# Altium PCB PCB_CONTROL.PcbDoc (part 1 of 15)
Units mil, origin at the board's own origin, x right, y up, seen from the top; angles counter-clockwise.
Board outline 7360.03 x 4773.15 mil, 2 copper layers (Top Layer, Bottom Layer); 73 components, 135 nets, 396 pads, 106 vias.
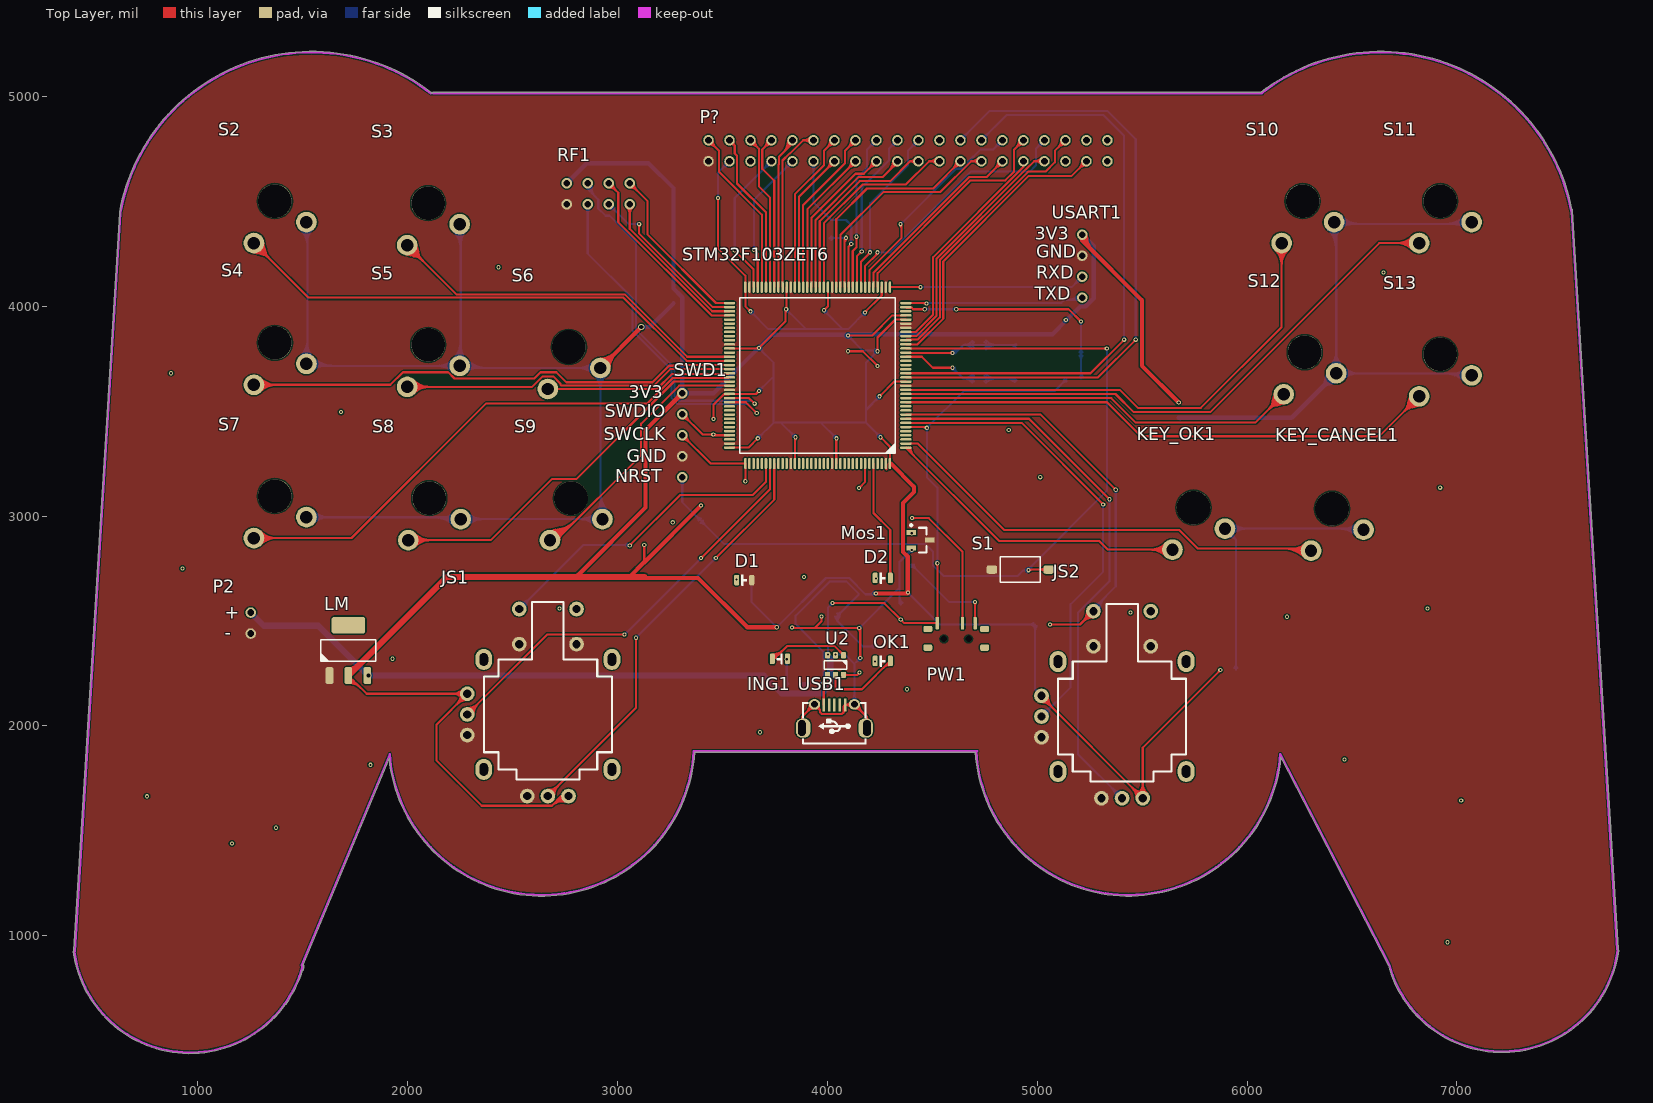
[diagram p0: Top Layer view]
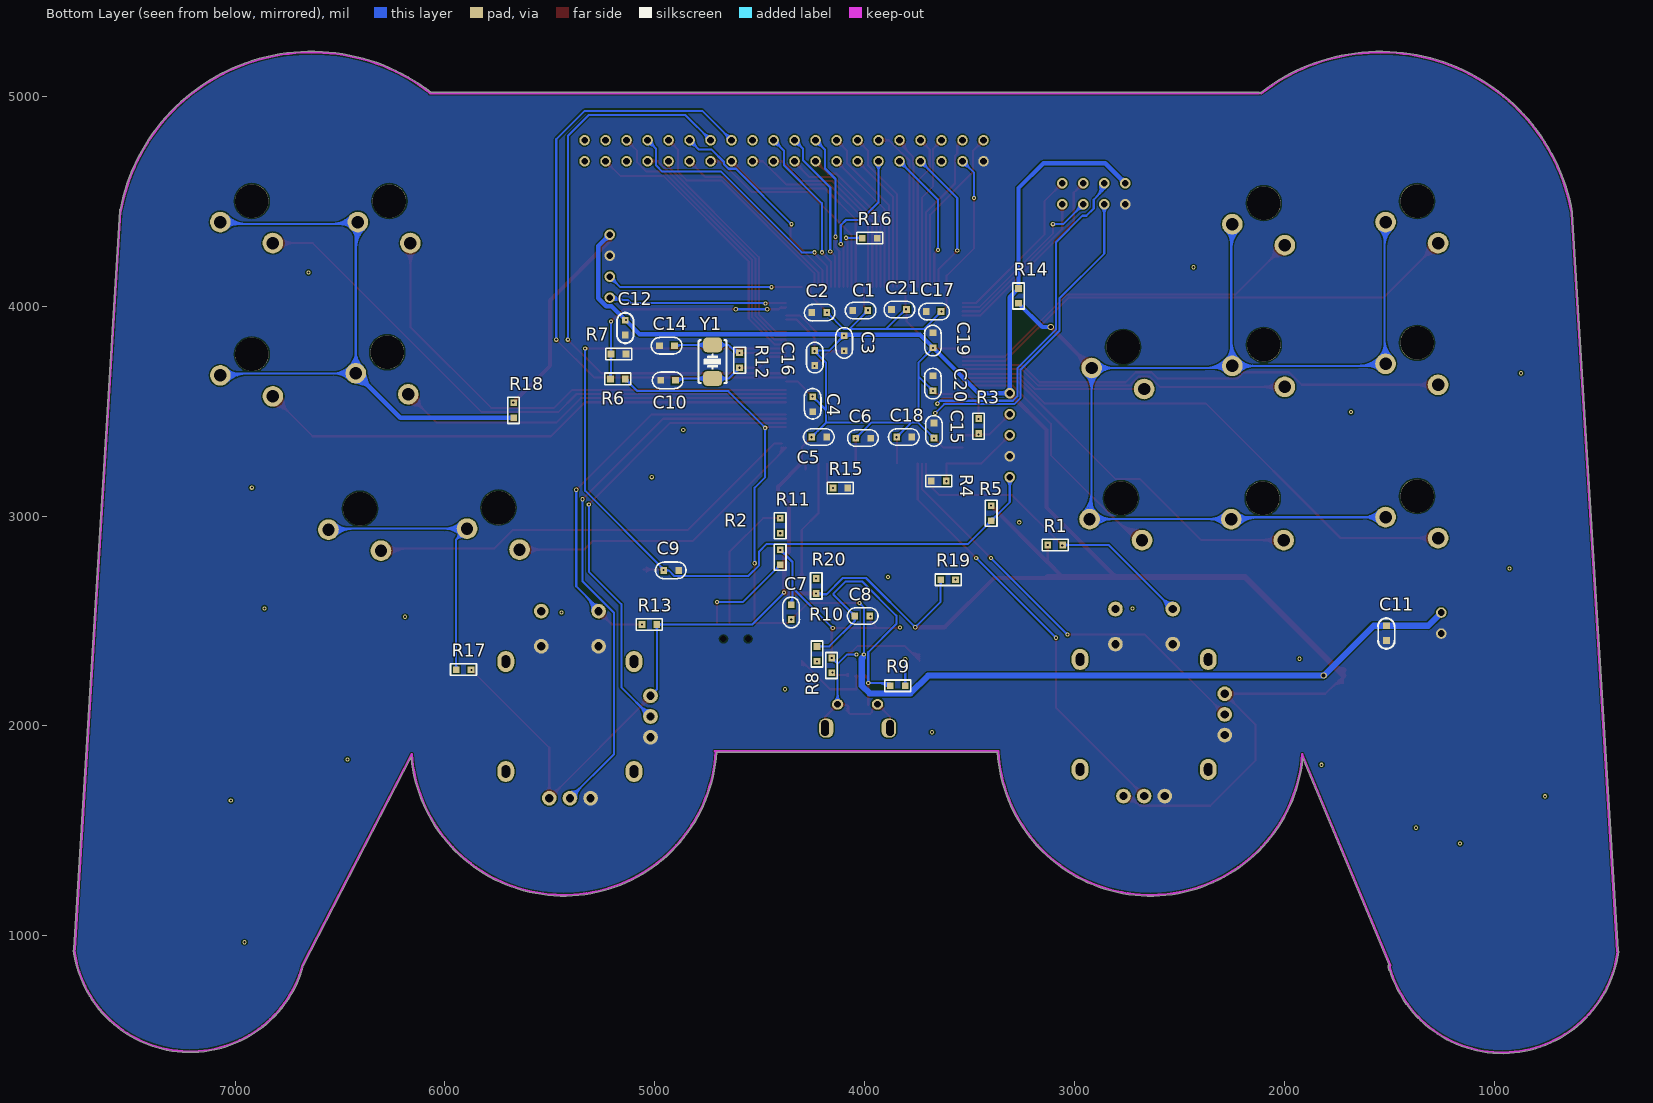
[diagram p1: Bottom Layer view, seen from below]
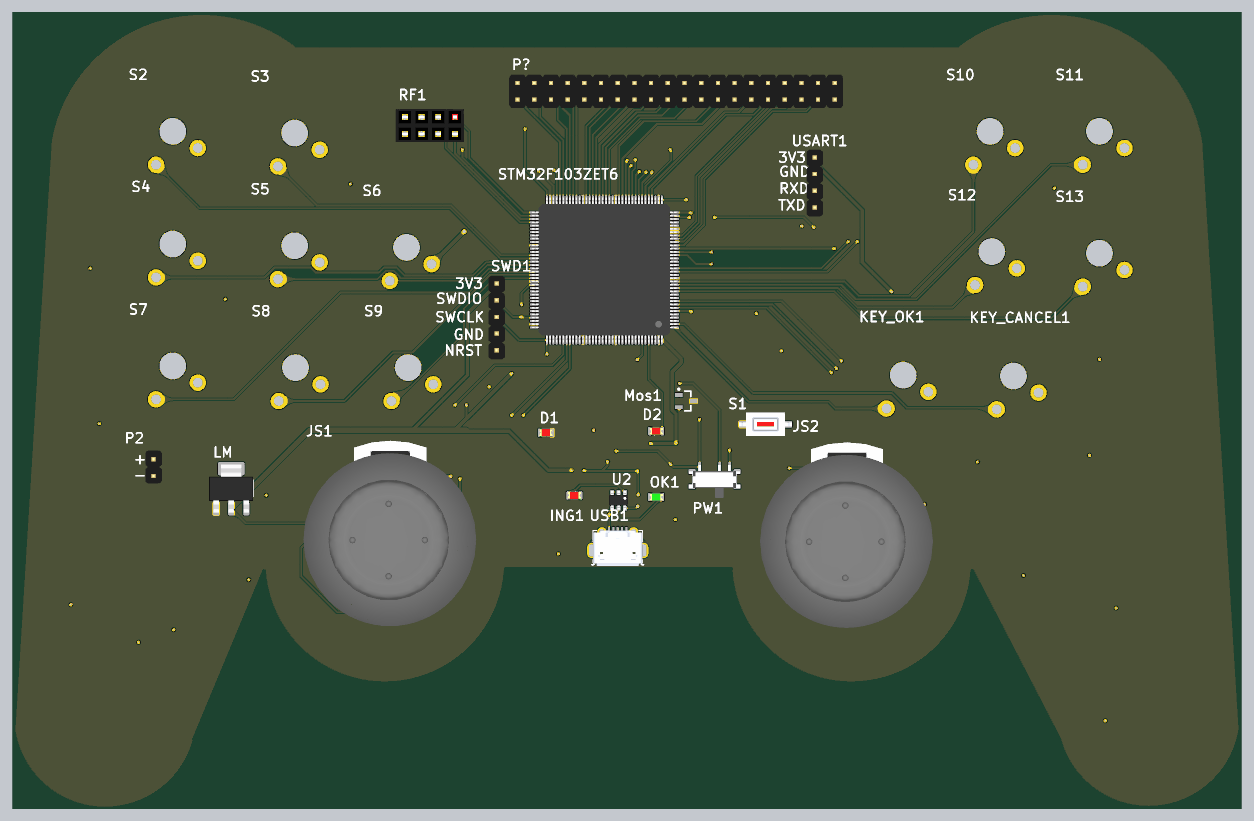
[diagram p16: 3D render of the assembled board from above, using the file's embedded part models]
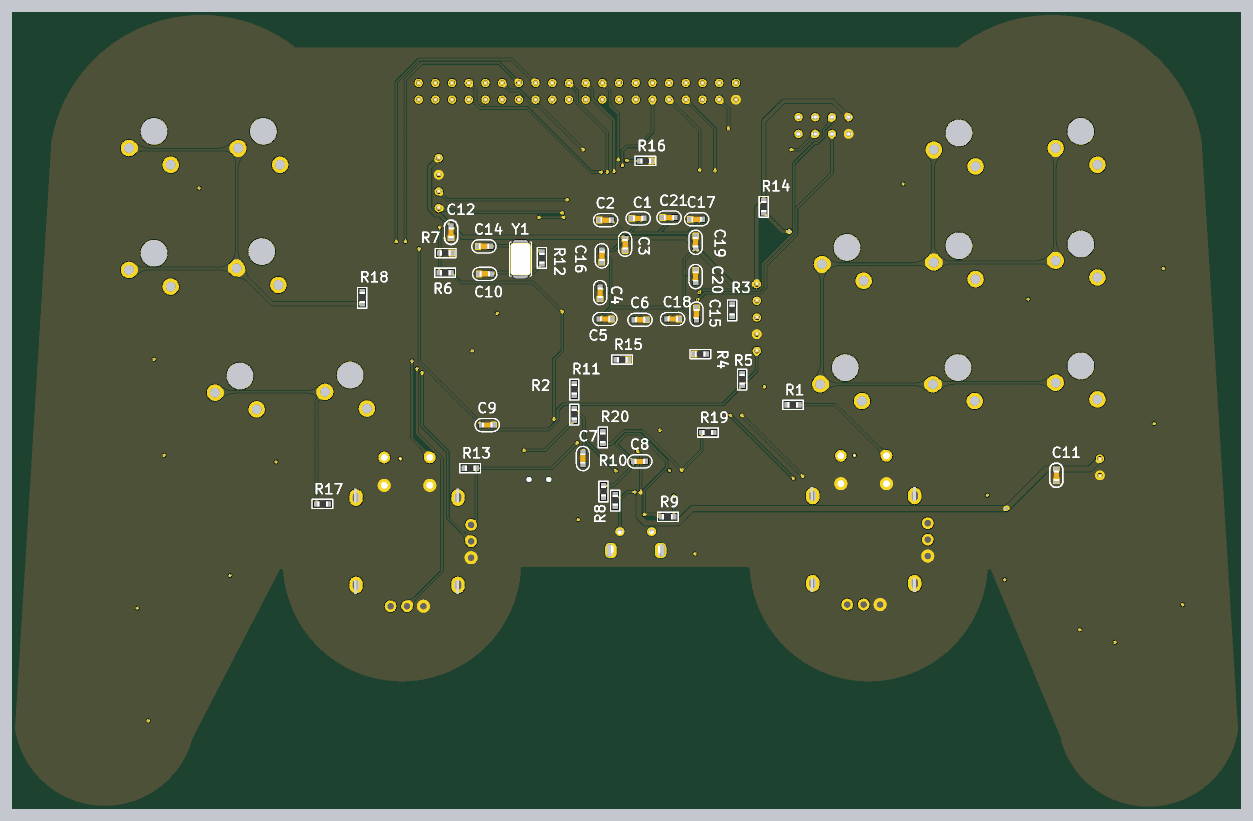
[diagram p17: 3D render of the assembled board from below, using the file's embedded part models]

## Layer stack, top to bottom
Top Layer: signal copper 1.4
Dielectric: dielectric 12.6, FR-4, Dk 4.8
Bottom Layer: signal copper 1.4

## Board outline
1500.25,834.99 ccw(c1500,840) 1504.96,839.23 ccw(c955,925) 1507.31,855.96 ccw(c1502.33,856.58) 1507.34,856.58 ccw(c1502.33,856.58) 1503.54,861.45 1913.66,1846.2 ccw(c2640,1920) 3368.7,1875.04 4706.3,1875.04 ccw(c5435,1920) 6161.73,1850.08 6673.98,860.03 ccw(c7215,1005) 7769.97,929.32 ccw(c7765,930) 7770.02,930 ccw(c7765,930) 7767.76,934.19 ccw(c7762.79,934.86) 7767.81,934.86 ccw(c7762.79,934.86) 7767.8,935.17 7550.01,4455.31 ccw(c7545,4455) 7547.46,4459.37 7547.45,4459.37 ccw(c6635.53,4284.64) 6065.24,5017.38 2122.64,5017.38 ccw(c2122.64,5012.36) 2117.84,5013.81 ccw(c2113.03,5012.36) 2116.12,5016.32 ccw(c1544.47,4284.64) 630.06,4445.87 ccw(c635,4445) 629.99,4445.29 629.99,4445.31 629.99,4445.29 412.46,929.32 ccw(c415,925) 410.03,924.32 ccw(c965,1000)

## Design rules (kind name [scope] priority, off if disabled: settings)
Clearance [All] p1: gap=6
Height [All] p1: minheight=0 maxheight=5000 prefheight=500
PolygonConnect [All] p1: connectstyle=Direct reliefconductorwidth=10 reliefentries=4 polygonreliefangle="90 Angle" airgapwidth=10
RoutingVias [All] p1: holewidth=28 width=50 viastyle="Through Hole" minholewidth=28 minwidth=50 maxholewidth=28 maxwidth=50
SolderMaskExpansion [All] p1: expansion=4
Width [All] p1: maxlimit=100 minlimit=10 preferedwidth=10
27 further rules are at their usual default settings.

## Components (designator, comment, footprint, x,y, rotation, side; value= is the part's Value field where it differs from the comment)
C1 "Cap" CAP_0603 4020,3980 r0 bottom
C2 "Cap" CAP_0603 4215,3970 r0 bottom
C3 "Cap" CAP_0603 4100,3825 r270 bottom
C4 "Cap" CAP_0603 4250,3535 r270 bottom
C5 "Cap" CAP_0603 4220,3375 r180 bottom
C6 "Cap" CAP_0603 4010,3370 r180 bottom
C7 "Cap_0603" CAP_0603 4350,2540 r90 bottom
C8 "Cap_0603" CAP_0603 4010,2525 r0 bottom
C9 "Cap" CAP_0603 4925,2740 r180 bottom
C10 "Cap" CAP_0603 4940,3645 r180 bottom
C11 "Cap_0603" CAP_0603 1515,2440 r90 bottom
C12 "Cap_0603" CAP_0603 5140,3895 r90 bottom
C14 "Cap" CAP_0603 4945,3810 r180 bottom
C15 "Cap" CAP_0603 3670,3405 r90 bottom
C16 "Cap" CAP_0603 4240,3755 r270 bottom
C17 "Cap" CAP_0603 3670,3975 r0 bottom
C18 "Cap" CAP_0603 3815,3375 r180 bottom
C19 "Cap" CAP_0603 3675,3835 r90 bottom
C20 "Cap" CAP_0603 3675,3630 r90 bottom
C21 "Cap" CAP_0603 3835,3985 r0 bottom
D1 "LED_0805" LED_0805_RED 3605,2695 r0 top
D2 "LED_0805" LED_0805_RED 4265,2705 r0 top
ING1 "LED_0805" LED_0805_RED 3775,2320 r180 top
JS1 "JoyStick" JoyStick 2670,2055 r270 top
JS2 "JoyStick" JoyStick 5405,2045 r270 top
KEY_CANCEL1 "MX_SW" MX_SW-1 6405,3035 r0 top
KEY_OK1 "MX_SW" MX_SW-1 5745,3040 r0 top
LM "LM1117" SOT223-3 1720,2360 r0 top
Mos1 "MOSFET N" Nmos_SOT23 4445,2885 r0 top
OK1 "LED_0805" LED_0805_GREEN 4265,2310 r0 top
P2 "HDR1x2_1.27" HDR1X2_2.54_180 1255,2440 r180 top
P? "HDR2x20_2.54" HDR2X20_2.54_180 3435,4690 r90 top
PW1 "SwitchSPDT_2.8x6.6_90" SwitchSPDT_2.8X6.6_90 4615,2415 r0 top
R1 "Res_0603" RES_0603 3095,2780 r0 bottom
R2 "Res_0603" RES_0603 4485,2805 r90 bottom
R3 "Res1" RES_0603 3540,3430 r90 bottom
R4 "Res1" RES_0603 3650,3085 r0 bottom
R5 "Res1" RES_0603 3480,3015 r90 bottom
R6 "Res_0603" RES_0603 5175,3735 r180 bottom
R7 "Res_0603" RES_0603 5175,3690 r0 bottom
R8 "Res_0603" RES_0603 4240,2290 r90 bottom
R9 "Res_0603" RES_0603 3845,2110 r0 bottom
R10 "Res_0603" RES_0603 4310,2345 r90 bottom
R11 "Res_0603" RES_0603 4485,2955 r90 bottom
R12 "Res1" RES_0603 4515,3740 r270 bottom
R13 "Res_0603" RES_0603 5025,2565 r180 bottom
R14 "Res_0603" RES_0603 3350,4050 r90 bottom
R15 "Res1" RES_0603 4115,3215 r180 bottom
R16 "Res1" RES_0603 3975,4405 r180 bottom
R17 "Res_0603" RES_0603 5910,2350 r180 bottom
R18 "Res_0603" RES_0603 5755,3505 r90 bottom
R19 "Res1" RES_0603 3605,2615 r0 bottom
R20 "Res1" RES_0603 4150,2665 r270 bottom
RF1 "NRF2401_优信" HDR2X4_2.54_180F 2760,4485 r90 top
S1 "SW-PB" ButtonTACT_3x6x2.5_180 4920,2745 r180 top
S2 "MX_SW" MX_SW-1 1370,4500 r0 top
S3 "MX_SW" MX_SW-1 2100,4490 r0 top
S4 "MX_SW" MX_SW-1 1370,3825 r0 top
S5 "MX_SW" MX_SW-1 2100,3815 r0 top
S6 "MX_SW" MX_SW-1 2770,3805 r0 top
S7 "MX_SW" MX_SW-1 1370,3095 r0 top
S8 "MX_SW" MX_SW-1 2105,3085 r0 top
S9 "MX_SW" MX_SW-1 2780,3085 r0 top
S10 "MX_SW" MX_SW-1 6265,4500 r0 top
S11 "MX_SW" MX_SW-1 6920,4500 r0 top
S12 "MX_SW" MX_SW-1 6275,3780 r0 top
S13 "MX_SW" MX_SW-1 6920,3770 r0 top
STM32F103ZET6 "STM32F103ZET6" LQFP_P0.5_144 3955,3670 r180 top (schematic designator U1)
SWD1 "Header 5" HDR1X5_2.54_180 3310,3585 r0 top
U2 "TP4059" SOT23-6 4040,2290 r270 top
USART1 "Header 4" HDR1x4_2.54_180 5215,4340 r0 top
USB1 "USB_Micro" USB_Micro-AB 4035,2000 r180 top
Y1 "8M" XT_5032_2 4725,3735 r270 bottom

## Footprints (in the part's own frame and the unit in brackets; to place one, negate y for a bottom-side part, rotate by r counter-clockwise, add the part's x,y. Pads: shape width x height; smd on the part's side, far side on the other; paste and mask are expansions set on the pad)
ButtonTACT_3x6x2.5_180 [mil]
  rrect50% 50x40 smd: 1(-135,0) 2(135,0)
  silkscreen extent -95,-60 95,60, body extent -157,-71 157,71, height 94
CAP_0603 [mil]
  rect 32x32 smd: 1(-33,1) 2(38,1)
  silkscreen extent -72,-38 73,41, body extent -30,-14 33,18, height 31
HDR1X2_2.54_180 [mil]
  round 50 hole 32: 1(0,0) 2(0,-100)
  body extent -49,-150 49,50, height 323
HDR1x4_2.54_180 [mil]
  round 50 hole 32: 1(0,0) 2(0,-100) 3(0,-200) 4(0,-300)
  body extent -49,-350 49,50, height 323
HDR1X5_2.54_180 [mil]
  round 50 hole 32: 1(0,0) 2(0,-100) 3(0,-200) 4(0,-300) 5(0,-400)
  body extent -49,-450 49,50, height 323
HDR2X4_2.54_180F [mil]
  round 50 hole 32: 1(0,0) 2(100,0) 3(0,-100) 4(100,-100) 5(0,-200) 6(100,-200) 7(0,-300) 8(100,-300)
  body extent -48,-355 148,55, height 335
HDR2X20_2.54_180 [mil]
  round 50 hole 32: 1(0,0) 2(100,0) 3(0,-100) 4(100,-100) 5(0,-200) 6(100,-200) 7(0,-300) 8(100,-300) 9(0,-400) 10(100,-400) 11(0,-500) 12(100,-500) 13(0,-600) 14(100,-600) 15(0,-700) 16(100,-700) 17(0,-800) 18(100,-800) 19(0,-900) 20(100,-900) 21(0,-1000) 22(100,-1000) 23(0,-1100) 24(100,-1100) 25(0,-1200) 26(100,-1200) 27(0,-1300) 28(100,-1300) 29(0,-1400) 30(100,-1400) 31(0,-1500) 32(100,-1500) 33(0,-1600) 34(100,-1600) 35(0,-1700) 36(100,-1700) 37(0,-1800) 38(100,-1800) 39(0,-1900) 40(100,-1900)
  body extent -50,-1950 150,50, height 335
JoyStick [mil]
  oval 100x80 hole 40 slot 60 at 0 deg: 0(-261.81,305.12) 0(-261.81,-305.12) 0(261.81,305.12) 0(261.81,-305.12)
  round 70 hole 39.37: 1(-98.43,-383.86) 2(0,-383.86) 3(98.43,-383.86) 4(388.86,-98.43) 5(388.86,0) 6(388.86,98.43) 7(-501.97,136.57) 8(-334.8,136.57) 9(-501.97,-136.57) 10(-334.8,-136.57)
  silkscreen extent -535,-305 310,305, body extent -592,-518 518,518, height 1126
LED_0805_GREEN [mil]
  rrect50% 24x50 smd: 1(-36,0) 2(36,0)
  silkscreen extent -12,-24 12,24, body extent -40,-25 40,25, height 43
LED_0805_RED [mil]
  rrect50% 24x50 smd: 1(-36,0) 2(36,0)
  silkscreen extent -12,-24 12,24, body extent -40,-25 40,25, height 43
LQFP_P0.5_144 [mil]
  oval 54x12 smd: 1(-420,344.49) 2(-420,324.8) 3(-420,305.12) 4(-420,285.43) 5(-420,265.75) 6(-420,246.06) 7(-420,226.38) 8(-420,206.69) 9(-420,187.01) 10(-420,167.32) 11(-420,147.64) 12(-420,127.95) 13(-420,108.27) 14(-420,88.58) 15(-420,68.9) 16(-420,49.21) 17(-420,29.53) 18(-420,9.84) 19(-420,-9.84) 20(-420,-29.53) 21(-420,-49.21) 22(-420,-68.9) 23(-420,-88.58) 24(-420,-108.27) 25(-420,-127.95) 26(-420,-147.64) 27(-420,-167.32) 28(-420,-187.01) 29(-420,-206.69) 30(-420,-226.38) 31(-420,-246.06) 32(-420,-265.75) 33(-420,-285.43) 34(-420,-305.12) 35(-420,-324.8) 36(-420,-344.49) 73(420,-344.49) 74(420,-324.8) 75(420,-305.12) 76(420,-285.43) 77(420,-265.75) 78(420,-246.06) 79(420,-226.38) 80(420,-206.69) 81(420,-187.01) 82(420,-167.32) 83(420,-147.64) 84(420,-127.95) 85(420,-108.27) 86(420,-88.58) 87(420,-68.9) 88(420,-49.21) 89(420,-29.53) 90(420,-9.84) 91(420,9.84) 92(420,29.53) 93(420,49.21) 94(420,68.9) 95(420,88.58) 96(420,108.27) 97(420,127.95) 98(420,147.64) 99(420,167.32) 100(420,187.01) 101(420,206.69) 102(420,226.38) 103(420,246.06) 104(420,265.75) 105(420,285.43) 106(420,305.12) 107(420,324.8) 108(420,344.49)
  oval 12x54 smd: 37(-344.49,-420) 38(-324.8,-420) 39(-305.12,-420) 40(-285.43,-420) 41(-265.75,-420) 42(-246.06,-420) 43(-226.38,-420) 44(-206.69,-420) 45(-187.01,-420) 46(-167.32,-420) 47(-147.64,-420) 48(-127.95,-420) 49(-108.27,-420) 50(-88.58,-420) 51(-68.9,-420) 52(-49.21,-420) 53(-29.53,-420) 54(-9.84,-420) 55(9.84,-420) 56(29.53,-420) 57(49.21,-420) 58(68.9,-420) 59(88.58,-420) 60(108.27,-420) 61(127.95,-420) 62(147.64,-420) 63(167.32,-420) 64(187.01,-420) 65(206.69,-420) 66(226.38,-420) 67(246.06,-420) 68(265.75,-420) 69(285.43,-420) 70(305.12,-420) 71(324.8,-420) 72(344.49,-420) 109(344.49,420) 110(324.8,420) 111(305.12,420) 112(285.43,420) 113(265.75,420) 114(246.06,420) 115(226.38,420) 116(206.69,420) 117(187.01,420) 118(167.32,420) 119(147.64,420) 120(127.95,420) 121(108.27,420) 122(88.58,420) 123(68.9,420) 124(49.21,420) 125(29.53,420) 126(9.84,420) 127(-9.84,420) 128(-29.53,420) 129(-49.21,420) 130(-68.9,420) 131(-88.58,420) 132(-108.27,420) 133(-127.95,420) 134(-147.64,420) 135(-167.32,420) 136(-187.01,420) 137(-206.69,420) 138(-226.38,420) 139(-246.06,420) 140(-265.75,420) 141(-285.43,420) 142(-305.12,420) 143(-324.8,420) 144(-344.49,420)
  silkscreen extent -370,-370 370,370, body extent -433,-433 433,433, height 63
MX_SW-1 [mm] "without Fixation pins  1-Pole"
  round 2.5 hole 1.5: 1(3.81,-2.54) 2(-2.54,-5.08)
  round 4.064 hole 4.064: ""(0,0)
Nmos_SOT23 [mm]
  rect 1.15x0.6 smd: D(1.125,0) G(-1.125,0.95) S(-1.125,-0.95)
  silkscreen extent -1.25,-1.5 0.7,1.92, body extent -0.7,-1.5 0.7,1.5, height 1.14
RES_0603 [mil]
  rect 32x32 smd: 1(-37,-82) 2(34,-82)
  silkscreen extent -64,-109 60,-54, body extent -31,-98 31,-66, height 18
SOT23-6 [mil]
  rrect50% 30x24 smd: 1(-47,38) 2(-47,0) 3(-47,-38) 4(47,-38) 5(47,0) 6(47,38)
  silkscreen extent -21,-53 21,53, body extent -55,-57 55,57, height 57
SOT223-3 [mil]
  rrect40% 36x80 smd: 1(-90.16,-120) 2(0,-120) 3(90.16,-120)
  rrect30% 160x80 smd: 4(0,120)
  silkscreen extent -131,-51 131,51, body extent -132,-144 132,144, height 71
SwitchSPDT_2.8X6.6_90 [mil]
  rrect50% 42x30 smd: 0(-135,-42) 0(-135,47) 0(135,-42) 0(135,47)
  round 10 hole 31.5: 0(-59.06,0) 0(59.06,0)
  rrect50% 16x60 smd: 1(90,75) 2(30,75) 3(-90,75)
  body extent -152,-111 151,86, height 55
USB_Micro-AB [mil]
  rrect80% 68x90 hole 37 slot 75 at 90 deg copper offset 6,0 mask+0: 0(-155,10)
  oval 54x50 hole 32 mask+0: 0(-95,-103) 0(95,-103)
  rrect80% 68x90 hole 37 slot 75 at 90 deg copper offset -6,0 mask+0: 0(155,10)
  rrect50% 12x64 smd: 1(51.18,-100) 2(25.59,-100) 3(0,-100) 4(-25.59,-100) 5(-51.18,-100)
  silkscreen extent -150,-113 150,86, body extent -161,-109 161,104, height 108
XT_5032_2 [mil]
  rrect50% 70x90 smd: 1(-80,0) 2(80,0)
  silkscreen extent -105,-69 105,69, body extent -98,-63 98,63, height 39

## Part data
C1 C2 C3 C4 C5 C6 C10 C14 C15 C16 C17 C18 C19 C20 C21: library part Cap_1, "Capacitor"
C7 C8 C9 C11 C12: "Capacitor"
D1 D2 ING1 OK1: "LED"
KEY_CANCEL1 KEY_OK1 S2 S3 S4 S5 S6 S7 S8 S9 S10 S11 S12 S13: library part MX_SW-1, "without Fixation pins  1-Pole"
LM: library part LDO1117, "Power"
Mos1: "MOS SOT23"
P2 P?: "Header"
PW1 S1: "Switch"
R1 R2 R6 R7 R8 R9 R10 R11 R13 R14 R17 R18: "Resistor"
R3 R4 R5 R12 R15 R16 R19 R20: library part Res1_1, "Resistor"
STM32F103ZET6: library part STM32F103ZE
SWD1: "Header, 5-Pin"
USART1: "Header, 4-Pin"
USB1: "USB"
Y1: library part C-Osc, "Crystal Oscillator"

## Via types
v1: diameter 20, hole 10, Top Layer to Bottom Layer, 104 vias
v2: diameter 30, hole 20, Top Layer to Bottom Layer, 2 vias

## Nets (pads, with @x,y where several pads share a name; then routed paths per layer and width w, separated by ;. In a path a pad name is that pad's centre, name@x,y a point inside that pad or via, vN(x,y) a via of type N, cw(c..) or ccw(c..) an arc to the next point about the centre after c; other vN are vias at no path point)
3V3: C1.1 C2.1 C3.1 C4.1 C5.1 C6.1 C12.2 C15.1 C16.1 C17.1 C18.1 C19.1 C20.1 C21.1 JS1.1 JS1.6 JS2.1 JS2.6 LM.2 P?.3 R1.2 R3.2 R5.2 R13.2 R14.2 R17.2 R18.2 R19.2 R20.2 RF1.2 STM32F103ZET6.17 STM32F103ZET6.32 STM32F103ZET6.33 STM32F103ZET6.39 STM32F103ZET6.52 STM32F103ZET6.62 STM32F103ZET6.72 STM32F103ZET6.84 STM32F103ZET6.95 STM32F103ZET6.108 STM32F103ZET6.121 STM32F103ZET6.131 STM32F103ZET6.144 SWD1.1 USART1.1 | length 56166.5
  Top Layer w10: LM.2@1720,2205 cw(c1720,2120.5) 1779.75,2180.25 ; LM.2@1720,2215 cw(c1720,2154.64) 1762.68,2197.32 ; LM.2@1720,2225 cw(c1720,2188.79) 1745.61,2214.39 ; LM.2@1720,2240 1806.57,2153.43 JS1.1@2286.14,2153.43 2140,2007.28 2140,1835 2354.86,1620.14 2689.05,1620.14 ; JS1.1@2256.14,2153.43 cw(c2183.72,2153.43) 2234.93,2102.21 cw(c2286.14,2051) JS1.1@2286.14,2123.43 ; JS1.1@2264.93,2132.21 ccw(c2213.72,2081) 2213.72,2153.43 ccw(c2213.72,2225.85) JS1.1@2264.93,2174.64 ; JS1.1@2266.14,2153.43 cw(c2217.86,2153.43) 2252,2119.28 cw(c2286.14,2085.14) JS1.1@2286.14,2133.43 ; JS1.1@2272,2139.28 ccw(c2237.86,2105.14) 2237.86,2153.43 ccw(c2237.86,2201.71) JS1.1@2272,2167.57 ; 2700.75,1631.84 cw(c2744.19,1588.4) JS1.6@2762.47,1647.05 ; 2712.45,1643.53 cw(c2749.75,1606.23) JS1.6@2765.45,1656.59 ; 2724.14,1655.23 cw(c2755.31,1624.06) JS1.6@2768.43,1666.14 2735.05,1666.14 2689.05,1620.14 ; JS1.6@2759.5,1637.5 ccw(c2738.63,1570.57) 2689.06,1620.14 ; 3125,2705 3130,2710 ; v1@3125.46,2858.46 cw(c3116.93,2849.93) 3129,2849.93 cw(c3141.07,2849.93) v1@3132.54,2858.46 ; 3129,2781 v1(3129,2862) ; v1(3459,3462) 3459,3530.77 3506.96,3578.73 ; v1(3480,4515) 3480,4275 3610.51,4144.49 STM32F103ZET6.72@3610.51,4090 3610.51,3999.49 v1(3635,3975) ; STM32F103ZET6.108@3535,3325.51 3625.51,3325.51 v1(3670,3370) ; STM32F103ZET6.84@3535,3797.95 3672.95,3797.95 v1(3675,3800) 3801.46,3926.46 v1@3801.46,3988.54 ; 3657.99,3797.95 ccw(c3657.99,3817.01) v1@3671.46,3803.54 ; v1(3675,3595) 3661.42,3581.42 STM32F103ZET6.95@3535,3581.42 3532.32,3578.73 3506.96,3578.73 ; v1@3675,3805 ccw(c3675,3817.07) 3683.54,3808.54 ccw(c3692.07,3800) v1@3680,3800 ; v1@3807.36,3988.54 STM32F103ZET6.62@3807.36,4090 ; STM32F103ZET6.121@3846.73,3250 3846.73,3371.73 v1(3850,3375) ; v1(3985,3980) 4004.21,3999.21 STM32F103ZET6.52@4004.21,4090 ; STM32F103ZET6.131@4043.58,3250 4043.58,3368.58 v1(4045,3370) ; v1(4100,3860) 4215,3860 4310.43,3955.43 STM32F103ZET6.33@4375,3955.43 ; v1(4180,3970) 4260.12,4050.12 ; v1(4240,3785) 4240,3850 4325.75,3935.75 STM32F103ZET6.32@4375,3935.75 ; v1(4250,3570) 4320.47,3640.47 ; v1(4255,3375) 4299.49,3330.51 STM32F103ZET6.144@4299.49,3250 ; STM32F103ZET6.39@4260.12,4090 4260.12,4050.12 ; STM32F103ZET6.17@4375,3640.47 4320.47,3640.47 ; JS2.1@5021.14,2113.43 cw(c5021.14,2053.07) 5063.82,2095.75 ; JS2.1@5021.14,2123.43 cw(c5021.14,2087.21) 5046.75,2112.82 ; JS2.1@5021.14,2143.43 5021.14,2138.43 JS2.6@5503.43,1656.14 5503.43,1896.71 v1(5872.86,2266.14) ; JS2.1@5041.14,2143.43 ccw(c5101.5,2143.43) 5058.82,2100.75 ; JS2.1@5051.14,2143.43 ccw(c5135.64,2143.43) 5075.89,2083.68 ; JS2.6@5473.43,1656.14 ccw(c5401,1656.14) 5452.21,1707.35 ccw(c5503.43,1758.57) JS2.6@5503.43,1686.14 ; JS2.6@5482.21,1677.35 ccw(c5431,1728.57) 5503.43,1728.57 ccw(c5575.85,1728.57) JS2.6@5524.64,1677.35 ; JS2.6@5483.43,1656.14 ccw(c5435.14,1656.14) 5469.28,1690.28 ccw(c5503.43,1724.43) JS2.6@5503.43,1676.14 ; JS2.6@5489.28,1670.28 ccw(c5455.14,1704.43) 5503.43,1704.43 ccw(c5551.71,1704.43) JS2.6@5517.57,1670.28 ; v1@5867.86,2266.14 cw(c5855.79,2266.14) 5864.32,2257.61 cw(c5872.86,2249.07) v1@5872.86,2261.14 ; v1@3455.46,3465.54 ccw(c3446.93,3474.07) 3459,3474.07 ; v1@3455.46,3465.54 ccw(c3446.93,3474.07) 3459,3474.07 ; v1@3455.46,3465.54 ccw(c3446.93,3474.07) 3459,3474.07 ; v1@3455.46,3465.54 ccw(c3446.93,3474.07) 3459,3474.07 ; 3459,3474.07 ccw(c3471.07,3474.07) v1@3462.54,3465.54 ; 3459,3474.07 ccw(c3471.07,3474.07) v1@3462.54,3465.54 ; 3459,3474.07 ccw(c3471.07,3474.07) v1@3462.54,3465.54 ; 3459,3474.07 ccw(c3471.07,3474.07) v1@3462.54,3465.54 ; v1@3476.46,4511.46 cw(c3467.93,4502.93) 3480,4502.93 ; v1@3476.46,4511.46 cw(c3467.93,4502.93) 3480,4502.93 ; v1@3476.46,4511.46 cw(c3467.93,4502.93) 3480,4502.93 ; v1@3476.46,4511.46 cw(c3467.93,4502.93) 3480,4502.93 ; 3480,4502.93 cw(c3492.07,4502.93) v1@3483.54,4511.46 ; 3480,4502.93 cw(c3492.07,4502.93) v1@3483.54,4511.46 ; 3480,4502.93 cw(c3492.07,4502.93) v1@3483.54,4511.46 ; 3480,4502.93 cw(c3492.07,4502.93) v1@3483.54,4511.46 ; 3504.86,3576.63 cw(c3514,3567.49) STM32F103ZET6.95@3514,3580.42 ; 3504.86,3576.63 cw(c3514,3567.49) STM32F103ZET6.95@3514,3580.42 ; 3504.86,3576.63 cw(c3514,3567.49) STM32F103ZET6.95@3514,3580.42 ; 3504.86,3576.63 cw(c3514,3567.49) STM32F103ZET6.95@3514,3580.42 ; 3504.86,3576.63 cw(c3514,3567.49) STM32F103ZET6.95@3514,3580.42 ; 3504.86,3576.63 cw(c3514,3567.49) STM32F103ZET6.95@3514,3580.42 ; 3504.86,3576.63 cw(c3514,3567.49) STM32F103ZET6.95@3514,3580.42 ; 3504.86,3576.63 cw(c3514,3567.49) STM32F103ZET6.95@3514,3580.42 ; 3504.86,3576.63 cw(c3514,3567.49) STM32F103ZET6.95@3514,3580.42 ; 3504.86,3576.63 cw(c3514,3567.49) STM32F103ZET6.95@3514,3580.42 ; 3506.96,3578.73 ccw(c3506.96,3586.3) STM32F103ZET6.95@3513.18,3581.99 ; 3506.96,3578.73 cw(c3511.79,3573.9) STM32F103ZET6.95@3513.72,3580.46 ; 3506.96,3578.73 cw(c3511.79,3573.9) STM32F103ZET6.95@3513.72,3580.46 ; 3506.96,3578.73 ccw(c3506.96,3586.3) STM32F103ZET6.95@3513.18,3581.99 ; 3506.96,3578.73 cw(c3511.79,3573.9) STM32F103ZET6.95@3513.72,3580.46 ; 3506.96,3578.73 ccw(c3506.96,3586.3) STM32F103ZET6.95@3513.18,3581.99 ; 3506.96,3578.73 cw(c3511.79,3573.9) STM32F103ZET6.95@3513.72,3580.46 ; 3506.96,3578.73 ccw(c3506.96,3586.3) STM32F103ZET6.95@3513.18,3581.99 ; 3506.96,3578.73 cw(c3511.79,3573.9) STM32F103ZET6.95@3513.72,3580.46 ; 3506.96,3578.73 ccw(c3506.96,3586.3) STM32F103ZET6.95@3513.18,3581.99 ; 3506.96,3578.73 cw(c3511.79,3573.9) STM32F103ZET6.95@3513.72,3580.46 ; 3506.96,3578.73 ccw(c3506.96,3586.3) STM32F103ZET6.95@3513.18,3581.99 ; 3506.96,3578.73 cw(c3511.79,3573.9) STM32F103ZET6.95@3513.72,3580.46 ; 3506.96,3578.73 ccw(c3506.96,3586.3) STM32F103ZET6.95@3513.18,3581.99 ; 3506.96,3578.73 cw(c3511.79,3573.9) STM32F103ZET6.95@3513.72,3580.46 ; 3506.96,3578.73 ccw(c3506.96,3586.3) STM32F103ZET6.95@3513.18,3581.99 ; 3506.96,3578.73 cw(c3511.79,3573.9) STM32F103ZET6.95@3513.72,3580.46 ; 3506.96,3578.73 ccw(c3506.96,3586.3) STM32F103ZET6.95@3513.18,3581.99 ; 3506.96,3578.73 cw(c3511.79,3573.9) STM32F103ZET6.95@3513.72,3580.46 ; 3506.96,3578.73 ccw(c3506.96,3586.3) STM32F103ZET6.95@3513.18,3581.99 ; 3626.46,3983.54 cw(c3617.93,3975) v1@3630,3975 ; 3626.46,3983.54 ccw(c3635,3992.07) v1@3635,3980 ; 3626.46,3983.54 ccw(c3635,3992.07) v1@3635,3980 ; 3626.46,3983.54 cw(c3617.93,3975) v1@3630,3975 ; 3626.46,3983.54 ccw(c3635,3992.07) v1@3635,3980 ; 3626.46,3983.54 cw(c3617.93,3975) v1@3630,3975 ; 3626.46,3983.54 ccw(c3635,3992.07) v1@3635,3980 ; 3626.46,3983.54 cw(c3617.93,3975) v1@3630,3975 ; 3626.46,3983.54 ccw(c3635,3992.07) v1@3635,3980 ; 3626.46,3983.54 cw(c3617.93,3975) v1@3630,3975 ; 3626.46,3983.54 ccw(c3635,3992.07) v1@3635,3980 ; 3626.46,3983.54 cw(c3617.93,3975) v1@3630,3975 ; 3626.46,3983.54 ccw(c3635,3992.07) v1@3635,3980 ; 3626.46,3983.54 cw(c3617.93,3975) v1@3630,3975 ; 3661.46,3361.46 cw(c3670,3352.93) v1@3670,3365 ; 3661.46,3361.46 ccw(c3652.93,3370) v1@3665,3370 ; 3661.46,3361.46 ccw(c3652.93,3370) v1@3665,3370 ; 3661.46,3361.46 cw(c3670,3352.93) v1@3670,3365 ; 3661.46,3361.46 ccw(c3652.93,3370) v1@3665,3370 ; 3661.46,3361.46 cw(c3670,3352.93) v1@3670,3365 ; 3661.46,3361.46 ccw(c3652.93,3370) v1@3665,3370 ; 3661.46,3361.46 cw(c3670,3352.93) v1@3670,3365 ; 3666.46,3586.46 cw(c3675,3577.93) v1@3675,3590 ; 3666.46,3586.46 ccw(c3657.93,3595) v1@3670,3595 ; 3666.46,3586.46 ccw(c3657.93,3595) v1@3670,3595 ; 3666.46,3586.46 cw(c3675,3577.93) v1@3675,3590 ; 3666.46,3586.46 ccw(c3657.93,3595) v1@3670,3595 ; 3666.46,3586.46 cw(c3675,3577.93) v1@3675,3590 ; 3666.46,3586.46 ccw(c3657.93,3595) v1@3670,3595 ; 3666.46,3586.46 cw(c3675,3577.93) v1@3675,3590 ; 3801.46,3964.39 cw(c3825.61,3964.39) v1@3808.54,3981.46 ; 3801.46,3964.39 cw(c3825.61,3964.39) v1@3808.54,3981.46 ; 3801.46,3964.39 cw(c3825.61,3964.39) v1@3808.54,3981.46 ; 3801.46,3964.39 cw(c3825.61,3964.39) v1@3808.54,3981.46 ; 3801.46,3964.39 cw(c3825.61,3964.39) v1@3808.54,3981.46 ; 3801.46,3964.39 cw(c3825.61,3964.39) v1@3808.54,3981.46 ; 3801.46,3964.39 cw(c3825.61,3964.39) v1@3808.54,3981.46 ; v1@3801.46,3988.54 ccw(c3787.23,4002.77) 3807.36,4002.77 ; v1@3801.46,3988.54 ccw(c3787.23,4002.77) 3807.36,4002.77 ; v1@3801.46,3988.54 ccw(c3787.23,4002.77) 3807.36,4002.77 ; v1@3801.46,3988.54 ccw(c3787.23,4002.77) 3807.36,4002.77 ; v1@3801.46,3988.54 ccw(c3787.23,4002.77) 3807.36,4002.77 ; v1@3801.46,3988.54 ccw(c3787.23,4002.77) 3807.36,4002.77 ; v1@3801.46,3988.54 ccw(c3787.23,4002.77) 3807.36,4002.77 ; v1@3802.03,3980.98 cw(c3798.42,3976.09) 3803.68,3973.06 ; v1@3802.03,3980.98 cw(c3798.42,3976.09) 3803.68,3973.06 ; v1@3802.03,3980.98 cw(c3798.42,3976.09) 3803.68,3973.06 ; v1@3802.03,3980.98 cw(c3798.42,3976.09) 3803.68,3973.06 ; v1@3802.03,3980.98 cw(c3798.42,3976.09) 3803.68,3973.06 ; v1@3802.03,3980.98 cw(c3798.42,3976.09) 3803.68,3973.06 ; v1@3802.03,3980.98 cw(c3798.42,3976.09) 3803.68,3973.06 ; v1@3802.03,3980.98 cw(c3798.42,3976.09) 3803.68,3973.06 ; v1@3802.03,3980.98 cw(c3798.42,3976.09) 3803.68,3973.06 ; v1@3802.03,3980.98 cw(c3798.42,3976.09) 3803.68,3973.06 ; v1@3802.03,3980.98 cw(c3798.42,3976.09) 3803.68,3973.06 ; v1@3802.03,3980.98 cw(c3798.42,3976.09) 3803.68,3973.06 ; v1@3802.03,3980.98 cw(c3798.42,3976.09) 3803.68,3973.06 ; v1@3802.03,3980.98 cw(c3798.42,3976.09) 3803.68,3973.06 ; v1@3802.03,3980.98 cw(c3798.42,3976.09) 3803.68,3973.06 ; v1@3802.03,3980.98 cw(c3798.42,3976.09) 3803.68,3973.06 ; v1@3802.03,3980.98 cw(c3798.42,3976.09) 3803.68,3973.06 ; v1@3802.03,3980.98 cw(c3798.42,3976.09) 3803.68,3973.06 ; v1@3802.03,3980.98 cw(c3798.42,3976.09) 3803.68,3973.06 ; v1@3802.03,3980.98 cw(c3798.42,3976.09) 3803.68,3973.06 ; v1@3802.03,3980.98 cw(c3798.42,3976.09) 3803.68,3973.06 ; STM32F103ZET6.121@3846.73,3271 3846.73,3307 ; STM32F103ZET6.121@3846.73,3271 3846.73,3307 ; STM32F103ZET6.121@3846.73,3271 3846.73,3307 ; 3846.73,3355.04 cw(c3869.96,3355.04) v1@3853.54,3371.46 ; 3846.73,3355.04 cw(c3869.96,3355.04) v1@3853.54,3371.46 ; 3846.73,3355.04 cw(c3869.96,3355.04) v1@3853.54,3371.46 ; 3846.73,3355.04 cw(c3869.96,3355.04) v1@3853.54,3371.46 ; 3846.73,3355.04 cw(c3869.96,3355.04) v1@3853.54,3371.46 ; 3846.73,3355.04 cw(c3869.96,3355.04) v1@3853.54,3371.46 ; 3846.73,3355.04 cw(c3869.96,3355.04) v1@3853.54,3371.46 ; 3846.73,3355.04 cw(c3869.96,3355.04) v1@3853.54,3371.46 ; v1@3847.21,3370.85 cw(c3844.11,3366.24) 3848.92,3363.47 ; v1@3847.21,3370.85 cw(c3844.11,3366.24) 3848.92,3363.47 ; v1@3847.21,3370.85 cw(c3844.11,3366.24) 3848.92,3363.47 ; v1@3847.21,3370.85 cw(c3844.11,3366.24) 3848.92,3363.47 ; v1@3847.21,3370.85 cw(c3844.11,3366.24) 3848.92,3363.47 ; v1@3847.21,3370.85 cw(c3844.11,3366.24) 3848.92,3363.47 ; v1@3847.21,3370.85 cw(c3844.11,3366.24) 3848.92,3363.47 ; v1@3847.21,3370.85 cw(c3844.11,3366.24) 3848.92,3363.47 ; v1@3847.21,3370.85 cw(c3844.11,3366.24) 3848.92,3363.47 ; v1@3847.21,3370.85 cw(c3844.11,3366.24) 3848.92,3363.47 ; v1@3847.21,3370.85 cw(c3844.11,3366.24) 3848.92,3363.47 ; v1@3847.21,3370.85 cw(c3844.11,3366.24) 3848.92,3363.47 ; v1@3847.21,3370.85 cw(c3844.11,3366.24) 3848.92,3363.47 ; v1@3847.21,3370.85 cw(c3844.11,3366.24) 3848.92,3363.47 ; v1@3847.21,3370.85 cw(c3844.11,3366.24) 3848.92,3363.47 ; v1@3847.21,3370.85 cw(c3844.11,3366.24) 3848.92,3363.47 ; v1@3847.21,3370.85 cw(c3844.11,3366.24) 3848.92,3363.47 ; v1@3847.21,3370.85 cw(c3844.11,3366.24) 3848.92,3363.47 ; v1@3847.21,3370.85 cw(c3844.11,3366.24) 3848.92,3363.47 ; v1@3847.21,3370.85 cw(c3844.11,3366.24) 3848.92,3363.47 ; v1@3847.21,3370.85 cw(c3844.11,3366.24) 3848.92,3363.47 ; v1@3847.21,3370.85 cw(c3844.11,3366.24) 3848.92,3363.47 ; v1@3847.21,3370.85 cw(c3844.11,3366.24) 3848.92,3363.47 ; v1@3847.21,3370.85 cw(c3844.11,3366.24) 3848.92,3363.47 ; v1@3847.21,3370.85 cw(c3844.11,3366.24) 3848.92,3363.47 ; v1@3847.21,3370.85 cw(c3844.11,3366.24) 3848.92,3363.47 ; v1@3847.21,3370.85 cw(c3844.11,3366.24) 3848.92,3363.47 ; v1@3847.21,3370.85 cw(c3844.11,3366.24) 3848.92,3363.47 ; v1@3985,3985 ccw(c3985,3997.07) 3993.54,3988.54 ; v1@3985,3985 ccw(c3985,3997.07) 3993.54,3988.54 ; v1@3985,3985 ccw(c3985,3997.07) 3993.54,3988.54 ; v1@3985,3985 ccw(c3985,3997.07) 3993.54,3988.54 ; v1@3985,3985 ccw(c3985,3997.07) 3993.54,3988.54 ; v1@3985,3985 ccw(c3985,3997.07) 3993.54,3988.54 ; v1@3985,3985 ccw(c3985,3997.07) 3993.54,3988.54 ; v1@3990,3980 cw(c4002.07,3980) 3993.54,3988.54 ; v1@3990,3980 cw(c4002.07,3980) 3993.54,3988.54 ; v1@3990,3980 cw(c4002.07,3980) 3993.54,3988.54 ; v1@3990,3980 cw(c4002.07,3980) 3993.54,3988.54 ; v1@3990,3980 cw(c4002.07,3980) 3993.54,3988.54 ; v1@3990,3980 cw(c4002.07,3980) 3993.54,3988.54 ; v1@3990,3980 cw(c4002.07,3980) 3993.54,3988.54 ; STM32F103ZET6.131@4043.58,3271 4043.58,3307 ; STM32F103ZET6.131@4043.58,3271 4043.58,3307 ; STM32F103ZET6.131@4043.58,3271 4043.58,3307 ; 4043.58,3354.51 cw(c4060.49,3354.51) v1@4048.54,3366.46 ; 4043.58,3354.51 cw(c4060.49,3354.51) v1@4048.54,3366.46 ; 4043.58,3354.51 cw(c4060.49,3354.51) v1@4048.54,3366.46 ; 4043.58,3354.51 cw(c4060.49,3354.51) v1@4048.54,3366.46 ; 4043.58,3354.51 cw(c4060.49,3354.51) v1@4048.54,3366.46 ; 4043.58,3354.51 cw(c4060.49,3354.51) v1@4048.54,3366.46 ; 4043.58,3354.51 cw(c4060.49,3354.51) v1@4048.54,3366.46 ; 4043.58,3354.51 cw(c4060.49,3354.51) v1@4048.54,3366.46 ; v1@4103.54,3856.46 cw(c4112.07,3847.93) 4112.07,3860 ; v1@4103.54,3856.46 cw(c4112.07,3847.93) 4112.07,3860 ; v1@4103.54,3856.46 cw(c4112.07,3847.93) 4112.07,3860 ; v1@4103.54,3856.46 cw(c4112.07,3847.93) 4112.07,3860 ; v1@4103.54,3856.46 cw(c4112.07,3847.93) 4112.07,3860 ; v1@4103.54,3856.46 cw(c4112.07,3847.93) 4112.07,3860 ; v1@4103.54,3856.46 cw(c4112.07,3847.93) 4112.07,3860 ; v1@4103.54,3863.54 ccw(c4112.07,3872.07) 4112.07,3860 ; v1@4103.54,3863.54 ccw(c4112.07,3872.07) 4112.07,3860 ; v1@4103.54,3863.54 ccw(c4112.07,3872.07) 4112.07,3860 ; v1@4103.54,3863.54 ccw(c4112.07,3872.07) 4112.07,3860 ; v1@4103.54,3863.54 ccw(c4112.07,3872.07) 4112.07,3860 ; v1@4103.54,3863.54 ccw(c4112.07,3872.07) 4112.07,3860 ; v1@4103.54,3863.54 ccw(c4112.07,3872.07) 4112.07,3860 ; v1@4180,3975 ccw(c4180,3987.07) 4188.54,3978.54 ; v1@4180,3975 ccw(c4180,3987.07) 4188.54,3978.54 ; v1@4180,3975 ccw(c4180,3987.07) 4188.54,3978.54 ; v1@4180,3975 ccw(c4180,3987.07) 4188.54,3978.54 ; v1@4180,3975 ccw(c4180,3987.07) 4188.54,3978.54 ; v1@4180,3975 ccw(c4180,3987.07) 4188.54,3978.54 ; v1@4180,3975 ccw(c4180,3987.07) 4188.54,3978.54 ; v1@4180,3975 ccw(c4180,3987.07) 4188.54,3978.54 ; v1@4180,3975 ccw(c4180,3987.07) 4188.54,3978.54 ; v1@4180,3975 ccw(c4180,3987.07) 4188.54,3978.54 ; v1@4185,3970 cw(c4197.07,3970) 4188.54,3978.54 ; v1@4185,3970 cw(c4197.07,3970) 4188.54,3978.54 ; v1@4185,3970 cw(c4197.07,3970) 4188.54,3978.54 ; v1@4185,3970 cw(c4197.07,3970) 4188.54,3978.54 ; v1@4185,3970 cw(c4197.07,3970) 4188.54,3978.54 ; v1@4185,3970 cw(c4197.07,3970) 4188.54,3978.54 ; v1@4185,3970 cw(c4197.07,3970) 4188.54,3978.54 ; v1@4185,3970 cw(c4197.07,3970) 4188.54,3978.54 ; v1@4185,3970 cw(c4197.07,3970) 4188.54,3978.54 ; v1@4185,3970 cw(c4197.07,3970) 4188.54,3978.54 ; v1@4236.46,3788.54 ccw(c4227.93,3797.07) 4240,3797.07 ; v1@4236.46,3788.54 ccw(c4227.93,3797.07) 4240,3797.07 ; v1@4236.46,3788.54 ccw(c4227.93,3797.07) 4240,3797.07 ; v1@4236.46,3788.54 ccw(c4227.93,3797.07) 4240,3797.07 ; v1@4236.46,3788.54 ccw(c4227.93,3797.07) 4240,3797.07 ; v1@4236.46,3788.54 ccw(c4227.93,3797.07) 4240,3797.07 ; v1@4236.46,3788.54 ccw(c4227.93,3797.07) 4240,3797.07 ; 4240,3797.07 ccw(c4252.07,3797.07) v1@4243.54,3788.54 ; 4240,3797.07 ccw(c4252.07,3797.07) v1@4243.54,3788.54 ; 4240,3797.07 ccw(c4252.07,3797.07) v1@4243.54,3788.54 ; 4240,3797.07 ccw(c4252.07,3797.07) v1@4243.54,3788.54 ; 4240,3797.07 ccw(c4252.07,3797.07) v1@4243.54,3788.54 ; 4240,3797.07 ccw(c4252.07,3797.07) v1@4243.54,3788.54 ; 4240,3797.07 ccw(c4252.07,3797.07) v1@4243.54,3788.54 ; v1@4250,3575 ccw(c4250,3587.07) 4258.54,3578.54 ; v1@4250,3575 ccw(c4250,3587.07) 4258.54,3578.54 ; v1@4250,3575 ccw(c4250,3587.07) 4258.54,3578.54 ; v1@4250,3575 ccw(c4250,3587.07) 4258.54,3578.54 ; v1@4250,3575 ccw(c4250,3587.07) 4258.54,3578.54 ; v1@4250,3575 ccw(c4250,3587.07) 4258.54,3578.54 ; v1@4250,3575 ccw(c4250,3587.07) 4258.54,3578.54 ; v1@4250,3575 ccw(c4250,3587.07) 4258.54,3578.54 ; v1@4250,3575 ccw(c4250,3587.07) 4258.54,3578.54 ; v1@4250,3575 ccw(c4250,3587.07) 4258.54,3578.54 ; v1@4255,3370 cw(c4255,3357.93) 4263.54,3366.46 ; v1@4255,3370 cw(c4255,3357.93) 4263.54,3366.46 ; v1@4255,3370 cw(c4255,3357.93) 4263.54,3366.46 ; v1@4255,3370 cw(c4255,3357.93) 4263.54,3366.46 ; v1@4255,3370 cw(c4255,3357.93) 4263.54,3366.46 ; v1@4255,3370 cw(c4255,3357.93) 4263.54,3366.46 ; v1@4255,3570 cw(c4267.07,3570) 4258.54,3578.54 ; v1@4255,3570 cw(c4267.07,3570) 4258.54,3578.54 ; v1@4255,3570 cw(c4267.07,3570) 4258.54,3578.54 ; v1@4255,3570 cw(c4267.07,3570) 4258.54,3578.54 ; v1@4255,3570 cw(c4267.07,3570) 4258.54,3578.54 ; v1@4255,3570 cw(c4267.07,3570) 4258.54,3578.54 ; v1@4255,3570 cw(c4267.07,3570) 4258.54,3578.54 ; v1@4255,3570 cw(c4267.07,3570) 4258.54,3578.54 ; v1@4255,3570 cw(c4267.07,3570) 4258.54,3578.54 ; v1@4255,3570 cw(c4267.07,3570) 4258.54,3578.54 ; v1@4260,3375 ccw(c4272.07,3375) 4263.54,3366.46 ; v1@4260,3375 ccw(c4272.07,3375) 4263.54,3366.46 ; v1@4260,3375 ccw(c4272.07,3375) 4263.54,3366.46 ; v1@4260,3375 ccw(c4272.07,3375) 4263.54,3366.46 ; v1@4260,3375 ccw(c4272.07,3375) 4263.54,3366.46 ; v1@4260,3375 ccw(c4272.07,3375) 4263.54,3366.46 ; 4260.12,4050.12 STM32F103ZET6.39@4260.12,4069 ; 4260.12,4050.12 STM32F103ZET6.39@4260.12,4069 ; 4260.12,4050.12 STM32F103ZET6.39@4260.12,4069 ; 4320.47,3640.47 STM32F103ZET6.17@4354,3640.47 ; 4320.47,3640.47 STM32F103ZET6.17@4354,3640.47 ; 4320.47,3640.47 STM32F103ZET6.17@4354,3640.47 ; 5666.46,3548.54 ccw(c5675,3557.07) v1@5675,3545 ; 5666.46,3548.54 cw(c5657.93,3540) v1@5670,3540 ; 5666.46,3548.54 ccw(c5675,3557.07) v1@5675,3545 ; 5666.46,3548.54 cw(c5657.93,3540) v1@5670,3540 ; 5666.46,3548.54 ccw(c5675,3557.07) v1@5675,3545 ; 5666.46,3548.54 cw(c5657.93,3540) v1@5670,3540 ; 5666.46,3548.54 ccw(c5675,3557.07) v1@5675,3545 ; 5666.46,3548.54 cw(c5657.93,3540) v1@5670,3540 ; 5666.46,3548.54 ccw(c5675,3557.07) v1@5675,3545 ; 5666.46,3548.54 cw(c5657.93,3540) v1@5670,3540 ; 5666.46,3548.54 ccw(c5675,3557.07) v1@5675,3545 ; 5666.46,3548.54 cw(c5657.93,3540) v1@5670,3540 ; 5666.46,3548.54 ccw(c5675,3557.07) v1@5675,3545 ; 5666.46,3548.54 cw(c5657.93,3540) v1@5670,3540 ; 5666.46,3548.54 ccw(c5675,3557.07) v1@5675,3545 ; 5666.46,3548.54 cw(c5657.93,3540) v1@5670,3540
  Top Layer w20: 2815,2720 3135,3040 3135,3410 SWD1.1@3310,3585 ; 3058,2710 3129,2781 ; 3125,2705 3385,2705 3620,2470 v1(3760,2470) ; 3130,2780 v1(3400,3050) ; v1(4232,2631) 4384,2631 4384,2807.23 4362.07,2829.16 4362.07,3062.58 4414.49,3115 4414.49,3139 STM32F103ZET6.144@4303.49,3250 ; USART1.1@5215,4340 5215,4312.03 ; v1(5675,3540) 5499.61,3715.39 5499.61,4027.43 5215,4312.03 ; 3284.39,3559.39 cw(c3310,3533.79) SWD1.1@3310,3570 ; 3284.39,3559.39 ccw(c3258.79,3585) SWD1.1@3295,3585 ; 3284.39,3559.39 cw(c3310,3533.79) SWD1.1@3310,3570 ; 3284.39,3559.39 cw(c3310,3533.79) SWD1.1@3310,3570 ; 3284.39,3559.39 cw(c3310,3533.79) SWD1.1@3310,3570 ; 3284.39,3559.39 cw(c3310,3533.79) SWD1.1@3310,3570 ; 3284.39,3559.39 ccw(c3258.79,3585) SWD1.1@3295,3585 ; 3284.39,3559.39 cw(c3310,3533.79) SWD1.1@3310,3570 ; 3284.39,3559.39 ccw(c3258.79,3585) SWD1.1@3295,3585 ; 3284.39,3559.39 ccw(c3258.79,3585) SWD1.1@3295,3585 ; 3284.39,3559.39 ccw(c3258.79,3585) SWD1.1@3295,3585 ; 3284.39,3559.39 ccw(c3258.79,3585) SWD1.1@3295,3585 ; 4375.34,2631 ccw(c4375.34,2644.66) v1(4385,2635) ; 4375.34,2631 ccw(c4375.34,2644.66) v1(4385,2635) ; 4375.34,2631 ccw(c4375.34,2644.66) v1(4385,2635) ; 4375.34,2631 ccw(c4375.34,2644.66) v1(4385,2635) ; 4375.34,2631 ccw(c4375.34,2644.66) v1(4385,2635) ; 4375.34,2631 ccw(c4375.34,2644.66) v1(4385,2635) ; USART1.1@5206.7,4327.5 cw(c5196.43,4312.03) 5215,4312.03 ; USART1.1@5206.7,4327.5 cw(c5196.43,4312.03) 5215,4312.03 ; USART1.1@5206.7,4327.5 cw(c5196.43,4312.03) 5215,4312.03 ; USART1.1@5206.7,4327.5 cw(c5196.43,4312.03) 5215,4312.03 ; USART1.1@5210,4340 ccw(c5265.45,4340) 5226.24,4300.79 ; USART1.1@5210,4340 ccw(c5265.45,4340) 5226.24,4300.79 ; USART1.1@5210,4340 ccw(c5265.45,4340) 5226.24,4300.79 ; USART1.1@5210,4340 ccw(c5265.45,4340) 5226.24,4300.79 ; 5215,4312.03 cw(c5233.57,4312.03) USART1.1@5223.3,4327.5 ; 5215,4312.03 cw(c5233.57,4312.03) USART1.1@5223.3,4327.5 ; 5215,4312.03 cw(c5233.57,4312.03) USART1.1@5223.3,4327.5 ; 5215,4312.03 cw(c5233.57,4312.03) USART1.1@5223.3,4327.5 ; USART1.1@5217.5,4344.33 cw(c5198.8,4311.94) 5234.92,4321.62 ; USART1.1@5217.5,4344.33 cw(c5198.8,4311.94) 5234.92,4321.62 ; USART1.1@5217.5,4344.33 cw(c5198.8,4311.94) 5234.92,4321.62 ; USART1.1@5217.5,4344.33 cw(c5198.8,4311.94) 5234.92,4321.62 ; USART1.1@5217.5,4344.33 cw(c5198.8,4311.94) 5234.92,4321.62 ; USART1.1@5217.5,4344.33 cw(c5198.8,4311.94) 5234.92,4321.62 ; USART1.1@5230,4340 ccw(c5333.74,4340) 5260.38,4266.65 ; USART1.1@5230,4340 ccw(c5333.74,4340) 5260.38,4266.65 ; USART1.1@5230,4340 ccw(c5333.74,4340) 5260.38,4266.65 ; USART1.1@5230,4340 ccw(c5333.74,4340) 5260.38,4266.65
  Top Layer w30: LM.2@1720,2240 2190,2710 3058,2710 3130,2710 ; LM.2@1720,2265 ccw(c1720,2325.36) 1762.68,2282.68 ; LM.2@1720,2265 ccw(c1720,2325.36) 1762.68,2282.68 ; LM.2@1720,2265 ccw(c1720,2325.36) 1762.68,2282.68 ; LM.2@1720,2265 ccw(c1720,2325.36) 1762.68,2282.68 ; LM.2@1720,2265 ccw(c1720,2325.36) 1762.68,2282.68 ; LM.2@1720,2265 ccw(c1720,2325.36) 1762.68,2282.68